# EAGLE board Meadowlark Mini Board v50 (EAGLE 9.7.0)
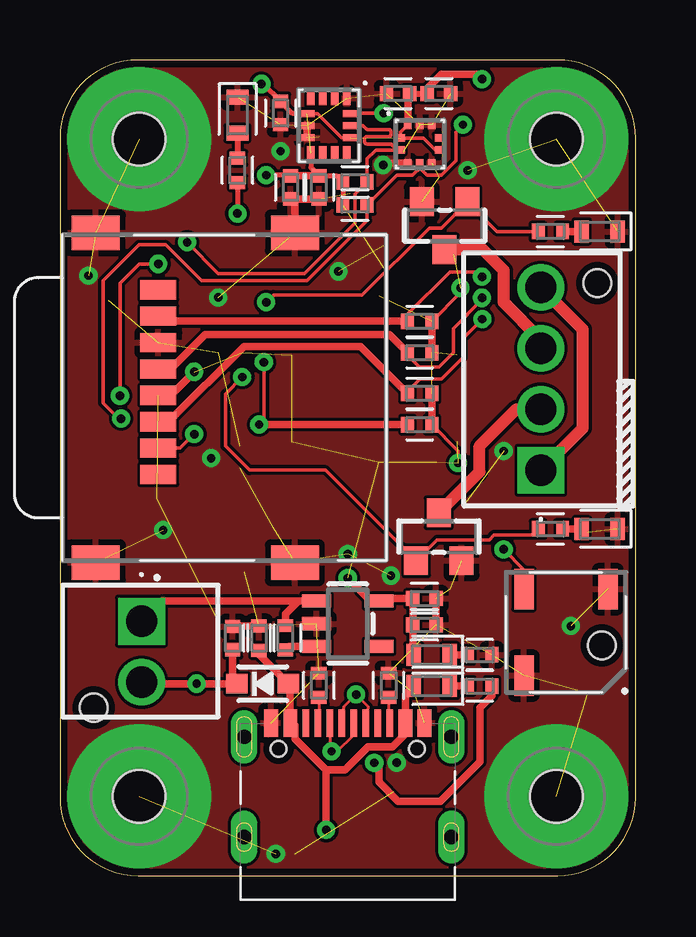
[diagram p0: board, top side]
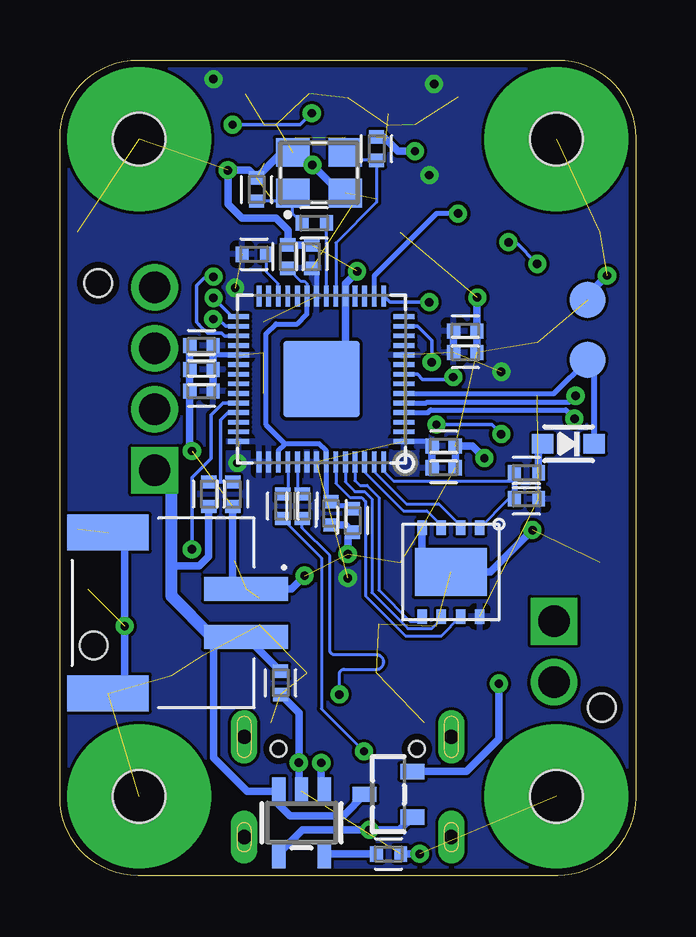
[diagram p1: board, bottom side, seen from below]

Size 24 x 34 mm. Coordinates in mm from the lower left corner, seen from the top.
Outline: 0,30.75 0,3.25 arc90 3.25,0 20.75,0 arc90 24,3.25 24,30.75 arc90 20.75,34 3.25,34 arc90 0,30.75
Copper layers (1*16): Top 0.035mm / dielectric 1.5mm / Bottom 0.035mm
Design rules "default *": minimum track width 5mil, minimum drill 0.35mm, track to track 5mil, track to pad 5mil, pad to pad 5mil, via to via 5mil, smd to smd 5mil, copper to edge 0.3mm, drill to drill 0.5mm, minimum pad ring 10mil, minimum via ring 8mil, stop-mask expansion 4mil, vias tented up to drill 0mil, thermal gap 10mil
Net classes: 1 power: width 0.305 mm
Holes 1.15 mm at 1.4,7 22.4,24.7 22.6,9.6

## Footprints (pad centres in the part's own frame; a part is rotated, then mirrored left to right if it is on the bottom)
CAPC1005X60 = smd 0.56 x 0.629: 1 -0.485,0; 2 0.485,0
SOD-323_MINI = smd 0.9 x 0.8: A 1.07,0; C -1.07,0
LEDC1608X55N_FLAT-R = smd 0.612 x 0.912: A 0.75,0; C -0.75,0
LEDC1608X55N_FLAT-Y = smd 0.612 x 0.912: A 0.75,0; C -0.75,0
ICM42670P = smd 0.6 x 0.3: 1 -1.15,0.75; 2 -1.15,0.25; 3 -1.15,-0.25; 4 -1.15,-0.75; 8 1.15,-0.75; 9 1.15,-0.25; 10 1.15,0.25; 11 1.15,0.75 | smd 0.3 x 0.6: 5 -0.5,-0.9; 6 0,-0.9; 7 0.5,-0.9; 12 0.5,0.9; 13 0,0.9; 14 -0.5,0.9
LPS22HHTR = smd 0.35 x 0.3: 1 -0.8,0.25; 2 -0.8,-0.25; 6 0.8,-0.25; 7 0.8,0.25 | smd 0.3 x 0.35: 3 -0.5,-0.8; 4 0,-0.8; 5 0.5,-0.8; 8 0.5,0.8; 9 0,0.8; 10 -0.5,0.8
TF04A = smd 0.8 x 1.5: 1 3.2,-2.755; 2 2.1,-2.755; 3 1,-2.755; 4 -0.1,-2.755; 5 -1.2,-2.755; 6 -2.3,-2.755; 7 -3.4,-2.755; 8 -4.5,-2.755 | smd 1.45 x 2: MH1 6.875,-5.355; MH2 6.875,2.945; MH3 -6.875,2.945; MH4 -6.875,-5.355
VN02A1500000G = drill 1.3 pad 1.95 square: 1 0,0 | drill 1.3 pad 1.95: 2 2.54,0
VN04A1500000G = drill 1.3 pad 1.95 square: 1 0,0 | drill 1.3 pad 1.95: 2 2.54,0; 3 5.08,0; 4 7.62,0
STANDOFF_HEX_MALE-FEMALE_400X500_M2X0.4_MTGP600H220 = drill 2.2 pad 6: 1 0,0 | hole 2.2: 0,0
JST_S2B-PH-SM4-TB(LF)(SN) = smd 1 x 3.5: 1 1,0; 2 -1,0 | smd 1.5 x 3.4: P1 3.35,5.75; P2 -3.35,5.75
SOT23-WIDE = smd 1 x 1.2: 1 -0.95,-1; 2 0.95,-1; 3 0,1
SOT23-R = smd 0.635 x 1.016: 1 -0.95,-1; 2 0.95,-1; 3 0,1
RESC1005X40 = smd 0.535 x 0.644: 1 -0.507,0; 2 0.507,0
QFN56_7MM_REDUCEDEPAD = smd 0.875 x 0.2: 1 -3.45,2.6; 2 -3.45,2.2; 3 -3.45,1.8; 4 -3.45,1.4; 5 -3.45,1; 6 -3.45,0.6; 7 -3.45,0.2; 8 -3.45,-0.2; 9 -3.45,-0.6; 10 -3.45,-1; 11 -3.45,-1.4; 12 -3.45,-1.8; 13 -3.45,-2.2; 14 -3.45,-2.6; 29 3.45,-2.6; 30 3.45,-2.2; 31 3.45,-1.8; 32 3.45,-1.4; 33 3.45,-1; 34 3.45,-0.6; 35 3.45,-0.2; 36 3.45,0.2; 37 3.45,0.6; 38 3.45,1; 39 3.45,1.4; 40 3.45,1.8; 41 3.45,2.2; 42 3.45,2.6 | smd 0.2 x 0.875: 15 -2.6,-3.45; 16 -2.2,-3.45; 17 -1.8,-3.45; 18 -1.4,-3.45; 19 -1,-3.45; 20 -0.6,-3.45; 21 -0.2,-3.45; 22 0.2,-3.45; 23 0.6,-3.45; 24 1,-3.45; 25 1.4,-3.45; 26 1.8,-3.45; 27 2.2,-3.45; 28 2.6,-3.45; 43 2.6,3.45; 44 2.2,3.45; 45 1.8,3.45; 46 1.4,3.45; 47 1,3.45; 48 0.6,3.45; 49 0.2,3.45; 50 -0.2,3.45; 51 -0.6,3.45; 52 -1,3.45; 53 -1.4,3.45; 54 -1.8,3.45; 55 -2.2,3.45; 56 -2.6,3.45 | smd 3.2 x 3.2: P$1 0,0
TESTPOINT_ROUND_1.5MM_NO = smd 1.5 x 1.5: P$1 0,0
USON8_4X4 = smd 0.6 x 0.4: 1 -1.85,1.2; 2 -1.85,0.4; 3 -1.85,-0.4; 4 -1.85,-1.2; 5 1.85,-1.2; 6 1.85,-0.4; 7 1.85,0.4; 8 1.85,1.2 | smd 2 x 3: PAD 0,0
SOT23-5 = smd 0.55 x 1.2: 1 -0.95,-1.3; 2 0,-1.3; 3 0.95,-1.3; 4 0.95,1.3; 5 -0.95,1.3
MLT5020 = smd 1.676 x 0.813: 1 -1.8,1.75; 2 -1.8,-1.75; 3 1.8,-1.75
USB_C_CUSB31-CFM2AX-01-X = smd 0.575 x 1.15: A1B12 -3.2,2.275; A4B9 -2.4,2.275; B1A12 3.2,2.275; B4A9 2.4,2.275 | smd 0.275 x 1.15: A5 -1.25,2.275; A6 -0.25,2.275; A7 0.25,2.275; A8 1.25,2.275; B5 1.75,2.275; B6 0.75,2.275; B7 -0.75,2.275; B8 -1.75,2.275 | drill 0.6 pad 1 long: M1 -4.32,1.7; M2 4.32,1.7; M3 -4.32,-2.48; M4 4.32,-2.48 | hole 0.65: 2.89,1.2; -2.89,1.2
X322512MSB4SI = smd 1.4 x 1.2: 1 -1.1,-0.85; 2 1.1,-0.85; 3 1.1,0.85; 4 -1.1,0.85

## Placement (x,y rotation side)
C1  10uF  [CAPC1005X60]  7.2,9.9 90 top
C2  33pF  [CAPC1005X60]  10.8,30.3 270 bottom
C3  33pF  [CAPC1005X60]  15.8,28.6 270 bottom
C4  10uF  [CAPC1005X60]  15.2,10.45 0 top
C5  10uF  [CAPC1005X60]  15.2,11.55 0 top
C6  0.1uF  [CAPC1005X60]  11.8,14.8 90 bottom
C7  0.1uF  [CAPC1005X60]  12.7,15.1 90 bottom
C8  1uF  [CAPC1005X60]  14.5,25.8 90 bottom
C9  0.1uF  [CAPC1005X60]  7.1,21.8 0 bottom
C10  1uF  [CAPC1005X60]  18.1,22.1 180 bottom
C11  0.1uF  [CAPC1005X60]  18.1,20.2 180 bottom
C12  0.1uF  [CAPC1005X60]  18.1,21.1 180 bottom
C13  0.1uF  [CAPC1005X60]  7.1,22.7 0 bottom
C14  0.1uF  [CAPC1005X60]  13.5,25.8 90 bottom
C15  0.1uF  [CAPC1005X60]  8,17.9 0 bottom
C16  0.1uF  [CAPC1005X60]  8,17 0 bottom
C17  0.1uF  [CAPC1005X60]  15.8,32.6 180 top
C18  10uF  [CAPC1005X60]  14.1,32.6 180 top
C19  0.1uF  [CAPC1005X60]  9.2,31.79 90 top
C20  10uF  [CAPC1005X60]  14.8,8.03 270 bottom
C21  10uF  [CAPC1005X60]  10.8,28.69 270 top
C22  10nF  [CAPC1005X60]  9.62,28.69 90 top
D1  NSR0320  [SOD-323_MINI]  2.8,18 180 bottom
D2  LED_RED  [LEDC1608X55N_FLAT-R]  15.5,9.2 180 top
D3  LED_RED  [LEDC1608X55N_FLAT-R]  7.4,31.7 270 top
D4  NSR0320  [SOD-323_MINI]  8.45,8 0 top
D5  LED_YELLOW  [LEDC1608X55N_FLAT-Y]  15.5,7.9 180 top
D6  LED_RED  [LEDC1608X55N_FLAT-R]  22.51,26.85 180 top
D7  LED_RED  [LEDC1608X55N_FLAT-R]  22.51,14.45 180 top
IC1  ICM-42670-P  [ICM42670P]  11.21,31.26 270 top
IC2  LPS22HHTR  [LPS22HHTR]  15,30.5 0 top
J1  TF-04A  [TF04A]  6.85,19.92 270 top
J2  VN02A1500000G  [VN02A1500000G]  3.4,10.6 270 top
J3  VN04A1500000G  [VN04A1500000G]  20.05,16.9 90 top
MP1  M2-5MM  [STANDOFF_HEX_MALE-FEMALE_400X500_M2X0.4_MTGP600H220]  3.3,3.3 0 top
MP2  M2-5MM  [STANDOFF_HEX_MALE-FEMALE_400X500_M2X0.4_MTGP600H220]  20.7,3.3 0 top
MP3  M2-5MM  [STANDOFF_HEX_MALE-FEMALE_400X500_M2X0.4_MTGP600H220]  20.7,30.7 0 top
MP4  M2-5MM  [STANDOFF_HEX_MALE-FEMALE_400X500_M2X0.4_MTGP600H220]  3.3,30.7 0 top
P1  S2B-PH-SM4-TB(LF)(SN)  [JST_S2B-PH-SM4-TB(LF)(SN)]  16.25,10.95 90 bottom
Q1  AO3400A  [SOT23-WIDE]  16.04,27.09 180 top
Q2  AO3400A  [SOT23-WIDE]  15.8,14.13 0 top
Q3  DMG3415  [SOT23-R]  10.3,3.39 90 bottom
R1  10K  [RESC1005X40]  4.55,15.7 0 bottom
R2  10K  [RESC1005X40]  17.5,7.9 0 top
R3  10K  [RESC1005X40]  9.4,9.91 90 top
R4  47K  [RESC1005X40]  15,23.1 180 top
R5  27  [RESC1005X40]  13.9,15.4 270 bottom
R6  10K  [RESC1005X40]  15.9,25.9 180 bottom
R7  10K  [RESC1005X40]  7.4,29.4 270 top
R8  5.1k  [RESC1005X40]  10.3,0.9 180 bottom
R9  27  [RESC1005X40]  14.7,15.4 270 bottom
R10  5.1k  [RESC1005X40]  10.8,7.93 270 top
R11  10K  [RESC1005X40]  17.5,9.2 0 top
R12  5.1k  [RESC1005X40]  13.7,7.93 270 top
R13  10K  [RESC1005X40]  12.3,27.95 180 top
R14  10K  [RESC1005X40]  20.45,26.85 180 top
R15  10K  [RESC1005X40]  12.3,28.92 180 top
R16  10K  [RESC1005X40]  20.45,14.45 180 top
R17  47K  [RESC1005X40]  17.8,15.9 90 bottom
R18  47K  [RESC1005X40]  16.8,15.9 270 bottom
R20  47K  [RESC1005X40]  15,20.1 180 top
R21  10K  [RESC1005X40]  8.3,9.9 270 top
R22  47K  [RESC1005X40]  15,21.8 180 top
R23  47K  [RESC1005X40]  15,18.8 180 top
R24  1k  [RESC1005X40]  4.55,16.8 0 bottom
R26  1K  [RESC1005X40]  13.4,27.2 0 bottom
RP2040  RP2040_QFN56  [QFN56_7MM_REDUCEDEPAD]  13.1,20.7 180 bottom
TP1  BOOT+  [TESTPOINT_ROUND_1.5MM_NO]  2,21.5 0 bottom
TP2  BOOT-  [TESTPOINT_ROUND_1.5MM_NO]  2,24 0 bottom
U1  W25Q64JVSSIQ  [USON8_4X4]  7.7,12.65 270 bottom
U2  RT9080-33GJ5  [SOT23-5]  12,10.5 270 top
U3  MCP73831T-2ACI/OT  [SOT23-5]  13.93,2.2 180 bottom
U$9  MLT-5020  [MLT5020]  21.1,10.14 270 top
X1  USB Type C  [USB_C_CUSB31-CFM2AX-01-X]  12,4.08 0 top
Y1  X322512MSB4SI  [X322512MSB4SI]  13.2,29.3 0 bottom

## Library data of the parts
C1-C22 = Capacitor; CATEGORY: Capacitor
D1 D4 Q1-Q3 TP1 TP2 U1 = microbuilder
D2 D3 D6 D7 = LED; CATEGORY: LED; COLOR: RED; DESCRIPTION: CHIP LED FLAT; SUB-CATEGORY: CHIP; TYPE: FLAT_TOP
D5 = LED; CATEGORY: LED; COLOR: YELLOW; DESCRIPTION: CHIP LED FLAT; SUB-CATEGORY: CHIP; TYPE: FLAT_TOP
IC1 = ICM-42670-P; DESCRIPTION: IMUs - Inertial Measurement Units Low-Power, Premium Performance 6-Axis MotionTrackingTM IMU with I3C, I2C and SPI interface in 2.5mm x 3mm Package; HEIGHT: mm; MANUFACTURER_NAME: TDK; MANUFACTURER_PART_NUMBER: ICM-42670-P; MOUSER_PART_NUMBER: 410-ICM-42670-P; MOUSER_PRICE-STOCK: https://www.mouser.co.uk/ProductDetail/TDK-InvenSense/ICM-42670-P?qs=iLbezkQI%252BsgK8sMF5V7fQQ%3D%3D
IC2 = LPS22HHTR; ARROW_PART_NUMBER: LPS22HHTR; ARROW_PRICE-STOCK: https://www.arrow.com/en/products/lps22hhtr/stmicroelectronics?region=nac; DESCRIPTION: STMICROELECTRONICS - LPS22HHTR - PRESSURE SENSOR, HLGA-10; HEIGHT: mm; MANUFACTURER_NAME: STMicroelectronics; MANUFACTURER_PART_NUMBER: LPS22HHTR; MOUSER_PART_NUMBER: 511-LPS22HHTR; MOUSER_PRICE-STOCK: https://www.mouser.co.uk/ProductDetail/STMicroelectronics/LPS22HHTR?qs=lc2O%252BfHJPVbKAkJQGWFcLg%3D%3D
J1 = TF-04A; DESCRIPTION: 13.55*13.51mm Card Sockets Connectors; HEIGHT: 1.5mm; MANUFACTURER_NAME: Korean Hroparts Elec; MANUFACTURER_PART_NUMBER: TF-04A
J2 = VN02A1500000G; DESCRIPTION: 2 Position Wire to Board Terminal Block Horizontal with Board 0.100" (2.54mm) Through Hole; HEIGHT: 8.8mm; MANUFACTURER_NAME: Amphenol; MANUFACTURER_PART_NUMBER: VN02A1500000G; MOUSER_PART_NUMBER: 649-VN02A15000J0G; MOUSER_PRICE-STOCK: https://www.mouser.co.uk/ProductDetail/Amphenol-Anytek/VN02A1500000G?qs=Mv7BduZupUgf8d3Xo6xdxw%3D%3D
J3 = VN04A1500000G; DESCRIPTION: 4 Position Wire to Board Terminal Block Horizontal with Board 0.100" (2.54mm) Through Hole; HEIGHT: 8.8mm; MANUFACTURER_NAME: Amphenol; MANUFACTURER_PART_NUMBER: VN04A1500000G; MOUSER_PART_NUMBER: 649-VN04A15000J0G; MOUSER_PRICE-STOCK: https://www.mouser.co.uk/ProductDetail/Amphenol-Anytek/VN04A1500000G?qs=Mv7BduZupUg1gSttWAc7xA%3D%3D
MP1-MP4 = PCB-Fasteners_Hardware; CATEGORY: Standoff/Spacer; SUB-CATEGORY: Male-Female
P1 = S2B-PH-SM4-TB_LF__SN_; AVAILABILITY: In Stock; CHECK_PRICES: https://www.snapeda.com/parts/S2B-PH-SM4-TB%20(LF)(SN)/JST+Sales+America+Inc./view-part/?ref=eda; DESCRIPTION: Connector Header Surface Mount, Right Angle 2 position 0.079 (2.00mm); MF: JST Sales; MP: S2B-PH-SM4-TB (LF)(SN); PACKAGE: None; PRICE: None; SNAPEDA_LINK: https://www.snapeda.com/parts/S2B-PH-SM4-TB%20(LF)(SN)/JST+Sales+America+Inc./view-part/?ref=snap
R1-R18 R20-R23 R26 = Tinkercad; CATEGORY: Resistor; SUB-CATEGORY: Fixed
R24 = Resistor; CATEGORY: Resistor; SUB-CATEGORY: Fixed
RP2040 = adafruit_micro; LCSC: C2040
U2 = adafruit_power; JLC_ROTATION: 0
U3 = microbuilder; JLC_ROTATION: 270; LCSC: C424093
U$9 = MLT-XXXX
X1 = adafruit_electromech; LCSC: C165948
Y1 = X322512MSB4SI; DESCRIPTION: SMD Crystal Resonators 12MHz +/-10ppm SMD-3225_4P RoHS; HEIGHT: 0.8mm; MANUFACTURER_NAME: Yangxing Tech; MANUFACTURER_PART_NUMBER: X322512MSB4SI

## Nets
1.2V: C6.2 C7.2 C8.1 RP2040.23 RP2040.45 RP2040.50
3.3V: C4.1 C5.1 C9.1 C10.1 C11.1 C12.1 C13.1 C14.1 C15.1 C16.1 C17.2 C18.1 C19.2 C21.1 C22.2 D2.A IC1.5 IC1.8 IC1.12 IC2.1 IC2.6 IC2.10 J1.4 R1.2 R4.1 R6.2 R13.2 R15.2 R20.1 R22.1 R23.1 RP2040.1 RP2040.10 RP2040.22 RP2040.33 RP2040.42 RP2040.43 RP2040.44 RP2040.48 RP2040.49 U1.8 U2.5
!RESET: R6.1 RP2040.26
A0: RP2040.38 U$9.2
A1: R17.2 R18.1 RP2040.39
A2: RP2040.40
A3: RP2040.41
CC1: R10.2 X1.A5
CC2: R12.2 X1.B5
D4: Q2.1 R16.2 RP2040.8
D5: RP2040.9
D6: RP2040.11
D9: RP2040.12
D10: J1.2 R23.2 RP2040.13
D11: RP2040.14
D12: Q1.1 R14.2 RP2040.15
D13: R7.2 RP2040.16
D16: RP2040.27
D24: RP2040.36
D25: RP2040.37
D+: R5.1 RP2040.47
D-: R9.1 RP2040.46
EN: R3.1 U2.3
GND [power]: C1.2 C2.1 C3.1 C4.2 C5.2 C6.1 C7.1 C8.2 C9.2 C10.2 C11.2 C12.2 C13.2 C14.2 C15.2 C16.2 C17.1 C18.2 C19.1 C20.2 C21.2 C22.1 D3.C D6.C D7.C IC1.1 IC1.6 IC1.7 IC2.3 IC2.5 IC2.8 IC2.9 J1.6 J1.MH1 J1.MH2 J1.MH3 J1.MH4 MP1.1 MP2.1 MP3.1 MP4.1 P1.1 P1.P1 P1.P2 Q1.2 Q2.2 R8.1 R10.1 R11.2 R12.1 R18.2 R21.1 RP2040.19 RP2040.P$1 TP2.P$1 U1.4 U1.PAD U2.2 U3.2 U$9.1 U$9.3 X1.A1B12 X1.B1A12 Y1.2 Y1.4
MISO: J1.7 R4.2 RP2040.31
MOSI: J1.3 R20.2 RP2040.30
N$1: D5.C R2.1
N$2: D2.C R11.1
N$3: R2.2 U3.1
N$4: R8.2 U3.5
N$5: D6.A R14.1
N$6: C3.2 R26.1 Y1.1
N$7: R26.2 RP2040.21
N$8: D1.A R24.2
N$9 [power]: J2.1 R3.2 U2.1
N$10: D3.A R7.1
N$11: D7.A R16.1
N$12: RP2040.17
N$13: C2.2 RP2040.20 Y1.3
N$14: RP2040.18
N$15: RP2040.7
N$18: RP2040.28
N$19: RP2040.32
N$20: RP2040.34
N$21: RP2040.35
PYRO1: J3.3 Q1.3
PYRO2: J3.2 Q2.3
QSPI_CS: R1.1 R24.1 RP2040.56 U1.1
QSPI_SCLK: RP2040.52 U1.6
QSPI_SD0: RP2040.53 U1.5
QSPI_SD1: RP2040.55 U1.2
QSPI_SD2: RP2040.54 U1.3
QSPI_SD3: RP2040.51 U1.7
RX: RP2040.3
SCK: J1.5 R22.2 RP2040.29
SCL: IC1.13 IC2.2 R15.1 RP2040.5
SDA: IC1.14 IC2.4 R13.1 RP2040.4
SWCLK: RP2040.24
SWDIO: RP2040.25
TX: RP2040.2
USB_D+: R5.2 X1.A6 X1.B6
USB_D-: R9.2 X1.A7 X1.B7
USBBOOT: D1.C RP2040.6 TP1.P$1
VBAT [power]: C20.1 J3.1 J3.4 P1.2 Q3.3 R17.1 U3.3
VBUS [power]: D4.A D5.A Q3.1 R21.2 U3.4 X1.A4B9 X1.B4A9
VHI [power]: C1.1 D4.C J2.2 Q3.2

## Tracks (layer width: path | path; a pad name or v marks a point on that pad's centre or on a via)
1.2V
  Bottom 0.127: C8.1 13.96,24.78 13.81,24.78 13.7,24.67 RP2040.23
  Bottom 0.203: C6.2 11.95,15.44 12.55,15.44 C7.2 12.9,15.79 RP2040.50 12.9,17.71 13.19,18 14.61,18 | 14.61,18 14.9,17.71 RP2040.45 | 14.61,18 15.4,18.79 15.4,22.6 15,23 14.1,23 13.7,23.4 RP2040.23
3.3V  (via drill 0.35)  (19 unrouted)
  Top 0.152: IC2.10 14.2,31 IC2.1 15.15,30.75 15.65,30.25 IC2.6 | R4.1 16.7,24.29 v16.7,24.5 | R23.1 16.6,17.71 v16.6,17.2 | IC1.5 10.74,31.77 11.74,30.77 IC1.12
  Top 0.203: IC1.5 9.71,31.77 C19.2 8.47,33 v8.4,33 | IC1.8 10.46,29.51 C21.1 11.54,29.17 R15.2 R13.2 | C22.2 9.59,29.2 v8.6,29.2
  Top 0.254: C18.1 C17.2
  Top 0.305: D2.A 14.71,9.23 C4.1 C5.1 13.4,11.55 U2.5 12.95,11.45 v12,12.4 | R23.1 R20.1 | R4.1 R22.1 | J1.4 4.28,20.2 4.8,20.2 v5.6,21 | C21.1 C22.2 | IC2.10 14.5,32.52 C18.1 | C17.2 15.31,32.81 15.9,33.4 17.4,33.4 v17.6,33.2
  Bottom 0.203: 17.61,22 C10.1 | RP2040.22 13.3,25.32 C14.1 | RP2040.33 17.61,21.7 | RP2040.1 8.69,18.1 C15.1
  Bottom 0.305: C10.1 17.61,21.7 C12.1 C11.1 | C16.1 C15.1 | C9.1 C13.1
  pour Bottom: -8.92,-7.92 34.92,-7.92 34.92,41.92 -8.92,41.92
!RESET
  Bottom 0.127: R6.1 15.39,25.16 14.9,24.67 RP2040.26
A0  (via drill 0.35)
  Top 0.152: U$9.2 19.35,12.75 v18.5,13.6
  Bottom 0.152: v18.5,13.6 18.5,16.58 17.7,17.38 17.7,19.2 17.2,19.7 RP2040.38
A1
  Bottom 0.152: R18.1 17.3,16.41 | 17.3,16.41 R17.2 | RP2040.39 17,19.3 17.3,19 17.3,16.41
CC1
  Top 0.127: R10.2 10.8,6.4 X1.A5
CC2
  Top 0.127: R12.2 13.7,6.41 X1.B5
D4  (via drill 0.35)
  Top 0.152: v7.6,20.78 6.9,20.08 6.9,17.9 7.9,16.9 11.08,16.9 Q2.1 15.72,14 17.9,14 18.1,14.2 19.69,14.2 R16.2
  Bottom 0.152: v7.6,20.78 7.7,20.68 8.88,20.68 9.1,20.9 RP2040.8
D10  (via drill 0.35)
  Top 0.152: J1.2 5.02,17.82 v5.6,18.4 | v8.3,18.8 8.5,19 v8.5,21.4
  Top 0.305: v8.3,18.8 R23.2 | 4.62,17.82 J1.2
  Bottom 0.152: v5.6,18.4 6,18.8 v8.3,18.8 | v8.5,21.4 8.5,22.3 9.1,22.9 RP2040.13
D12  (via drill 0.35)
  Top 0.152: v8.6,23.9 8.9,24.2 12.6,24.2 15.4,27 15.9,27 Q1.1 18.23,26.85 R14.2
  Bottom 0.152: RP2040.15 10.25,23.9 v8.6,23.9
D13  (via drill 0.35)
  Top 0.203: R7.2 v7.4,27.6
  Bottom 0.203: RP2040.16 10.9,25 8.3,27.6 v7.4,27.6
D+
  Bottom 0.127: RP2040.47 14.1,16.09 R5.1
D-
  Bottom 0.127: RP2040.46 14.5,16.09 R9.1
EN
  Top 0.305: R3.1 9.55,9.55 U2.3
GND  (via drill 0.35)  (44 unrouted)
  Top 0.305: J1.MH3 9.79,28.02 C22.1 C21.2 | IC2.3 13.55,29.7 v13.47,29.62 | C1.2 7.22,10.41 R21.1 | C4.2 C5.2 | IC1.7 IC1.6
  Bottom 0.305: R8.1 v9,0.9 | C20.2 14.04,6.79 v14.04,4.71 14.04,3.61 U3.2 | RP2040.P$1 12.1,21.7 RP2040.19 12.1,24.68 11.61,25.17 v11.61,25.19 | C10.2 C12.2 C11.2 18.59,17.79 v18.5,17.7 | R18.2 16.8,12.3 16.45,11.95 P1.1 14.35,11.95 v13.8,12.5 | P1.P2 21.3,8.3 v21.3,10.4 21.3,13.6 P1.P1 | U1.4 8.9,12.65 U1.PAD 6.05,12.65 v4.3,14.4 | C7.1 12.1,14.62 C6.1 12,14.12 v12,13.4 | C16.2 C15.2 6.8,17.9 v6.3,17.4 | C9.2 C13.2 6.62,24.09 v6.6,24.1 | TP2.P$1 2,24.2 v1.19,25.01 | Y1.2 12.3,28.45 v13.47,29.62 14,30.15 Y1.4 14.73,30.15 C3.1 16.11,29.4 v17,29.4 17,28 16.4,27.4 15,27.4 14.5,26.9 C8.2 C14.2 | C2.1 10.48,30.79 9.9,30.2 v9.2,30.2
  pour Top: -7.92,-6.92 33.92,-6.92 33.92,40.92 -7.92,40.92
MISO  (via drill 0.35)
  Top 0.152: v17.6,24.97 17.4,25.17 16.26,25.17 14.49,23.4 R4.2
  Top 0.305: R4.2 14.47,23.12 4.29,23.12 J1.7
  Bottom 0.152: RP2040.31 17.13,22.5 17.25,22.62 17.85,22.62 18.19,22.96 | 18.21,22.98 18.19,22.96 | 18.19,22.96 18.3,23.07 18.3,24.6 18,24.9 17.67,24.9 v17.6,24.97
MOSI  (via drill 0.35)
  Top 0.152: R20.2 14.49,20.19 15,20.7 15.9,20.7 16.8,21.6 16.8,22.39 v17.61,23.2
  Top 0.305: R20.2 12.54,22.06 7.68,22.06 4.54,18.92 J1.3
  Bottom 0.152: RP2040.30 17.1,22.9 17.4,23.2 v17.61,23.2
N$1
  Top 0.305: D5.C R2.1
N$2
  Top 0.305: D2.C R11.1
N$3  (via drill 0.35)
  Top 0.305: R2.2 18.01,7.5 17.5,6.99 17.5,4.74 15.86,3.1 14.1,3.1 13.3,3.9 13.3,4.51 v13.11,4.7
  Bottom 0.305: v13.11,4.7 13.11,3.63 U3.1
N$4
  Bottom 0.305: U3.5 R8.2
N$5
  Top 0.305: D6.A R14.1
N$6
  Bottom 0.127: R26.1 14.3,27.59 14.3,28.4 | 14.3,28.4 Y1.1 | C3.2 14.59,28.11 14.3,28.4
N$7
  Bottom 0.127: RP2040.21 R26.2
N$8
  Bottom 0.305: R24.2 4.04,17.83 D1.A
N$9
  Top 0.305: R3.2 9.4,10.9 9.95,11.45 U2.1 4.25,11.45 J2.1
N$10
  Top 0.254: D3.A R7.1
N$11
  Top 0.305: R16.1 D7.A
N$13
  Bottom 0.127: Y1.3 11.77,29.82 C2.2 10.8,28.07 12.5,26.37 RP2040.20
PYRO1
  Top 0.508: Q1.3 17.64,26.09 18.5,25.23 18.5,23.9 20.05,22.35 J3.3
PYRO2
  Top 0.508: Q2.3 17.5,16.83 17.5,17.9 19.04,19.44 J3.2
QSPI_CS
  Bottom 0.127: 6.55,14.55 U1.1 5.3,15.7 R1.1 | RP2040.56 10.5,16.85 10.1,16.45 5.21,16.45 5.06,16.6
  Bottom 0.254: R24.1 5.06,16.6 R1.1
QSPI_SCLK
  Bottom 0.127: RP2040.52 12.1,16.41 11.7,16.01 11.3,16.01 11,15.71 11,11.8 9.5,10.3 8.5,10.3 8.1,10.7 U1.6
QSPI_SD0
  Bottom 0.127: RP2040.53 11.7,16.46 11.5,16.26 11.2,16.26 10.7,15.77 10.7,11.9 9.4,10.6 9,10.6 8.9,10.7 U1.5
QSPI_SD1
  Bottom 0.127: U1.2 7.3,14.6 8.2,15.5 9.56,15.5 10.9,16.84 RP2040.55
QSPI_SD2
  Bottom 0.127: RP2040.54 11.3,16.83 9.67,15.2 8.7,15.2 8.1,14.6 U1.3
QSPI_SD3
  Bottom 0.127: RP2040.51 12.5,16.35 11.9,15.76 11.41,15.76 11.25,15.6 11.25,11.65 9.6,10 8.1,10 U1.7
SCK  (via drill 0.35)
  Top 0.152: R22.2 14.49,21.7 14.99,21.2 15.8,21.2 16.4,21.8 16.4,22.81 17.6,24.01 v17.6,24.08
  Top 0.305: R22.2 13.74,22.55 6.05,22.55 4.62,21.12 J1.5
  Bottom 0.152: v17.6,24.08 16.82,23.3 RP2040.29
SCL  (via drill 0.35)
  Top 0.152: v2.5,20 2.5,24.7 3.3,25.5 v4.1,25.5 | v5.3,26.4 6.6,25.1 10.2,25.1 12.3,27.2 12.3,28.42 R15.1 12.81,29.88 13.18,30.25 IC2.2 14.05,30.25 13.83,30.47 arc45 13.76,30.5 12.8,30.5 arc-90 12.7,30.6 12.7,30.7 arc-90 12.8,30.8 13.7,30.8 arc90 13.8,30.9 13.8,31 arc90 13.7,31.1 12.84,31.1 arc-45 12.77,31.13 12.64,31.27 IC1.13
  Bottom 0.152: v4.1,25.5 5,26.4 v5.3,26.4
  Bottom 0.203: RP2040.5 8.72,19.7 8.69,19.74 2.76,19.74 v2.5,20
SDA  (via drill 0.35)
  Top 0.152: v2.55,19.05 2.45,19.05 1.8,19.7 1.8,24.8 3.3,26.3 4.4,26.3 5.9,24.8 10.3,24.8 12.81,27.31 R13.1 14.05,29.2 14.7,29.2 15,29.5 | IC2.4 15,29.5 | 15,29.5 15.3,29.2 15.9,29.2 16.5,29.8 16.5,31 v16.8,31.3 | v13.5,31.78 12.12,31.78 IC1.14
  Bottom 0.152: v16.8,31.3 14,31.3 13.52,31.78 v13.5,31.78
  Bottom 0.203: RP2040.4 8.66,19.3 8.55,19.41 2.91,19.41 v2.55,19.05
USB_D+  (via drill 0.35)
  Top 0.127: X1.A6 11.85,7.05 v12.35,7.55 12.85,7.05 X1.B6
  Bottom 0.127: R5.2 13.9,14.49 12.75,13.34 12.75,9.4 arc-90 12.55,9.2 10.8,9.2 arc90 10.5,8.9 arc90 10.8,8.6 12.15,8.6 arc-90 12.35,8.4 v12.35,7.55
USB_D-  (via drill 0.35)
  Top 0.127: X1.B7 11.25,5.25 v11.32,5.18 11.55,5.18 12.25,5.87 X1.A7
  Bottom 0.127: v11.32,5.18 13.1,6.95 13.1,13.23 14.7,14.83 R9.2
USBBOOT
  Bottom 0.203: TP1.P$1 3.43,20.07 9.62,20.07 RP2040.6
  Bottom 0.254: TP1.P$1 1.73,21.23 D1.C
VBAT
  Top 0.508: J3.1 21.8,18.65 21.8,22.77 J3.4
  Bottom 0.305: C20.1 16.23,9.95 P1.2 17.25,9.95 17.6,9.6 17.6,4.9 16.2,3.5 U3.3 14.88,2.98 14.4,2.5 12.19,2.5 Q3.3 | R17.1 17.8,13.3 18.2,12.9 19.35,12.9
  Bottom 0.508: P1.2 17.65,9.95 19.35,11.65 19.35,12.9 19.35,16.2 J3.1
VBUS  (via drill 0.35)
  Top 0.305: 11.1,4.4 9.8,5.7 9.8,6.25 X1.A4B9 9.6,7.92 D4.A 8.3,9.22 R21.2 | D5.A 14.4,7.55 X1.B4A9 14.4,5.9 13.87,5.37 12.85,5.37 11.88,4.4 11.1,4.4 | 11.1,4.4 v11.1,1.9
  Bottom 0.305: U3.4 13.88,1.9 v11.1,1.9 9.84,1.9 Q3.1
VHI  (via drill 0.35)
  Top 0.305: J2.2 3.46,8 v5.7,8 D4.C 7.2,8.18 C1.1
  Bottom 0.305: Q3.2 7.06,4.34 5.7,5.7 v5.7,8